# Altium PCB PCB1.PcbDoc
Units mm, origin at the board's own origin, x right, y up, seen from the top; angles counter-clockwise.
Board outline 152.4 x 101.6 mm, 2 copper layers (Top Layer, Bottom Layer); 23 components, 84 nets, 266 pads, 70 vias.
Unrouted connection lines stored in the file: 3.
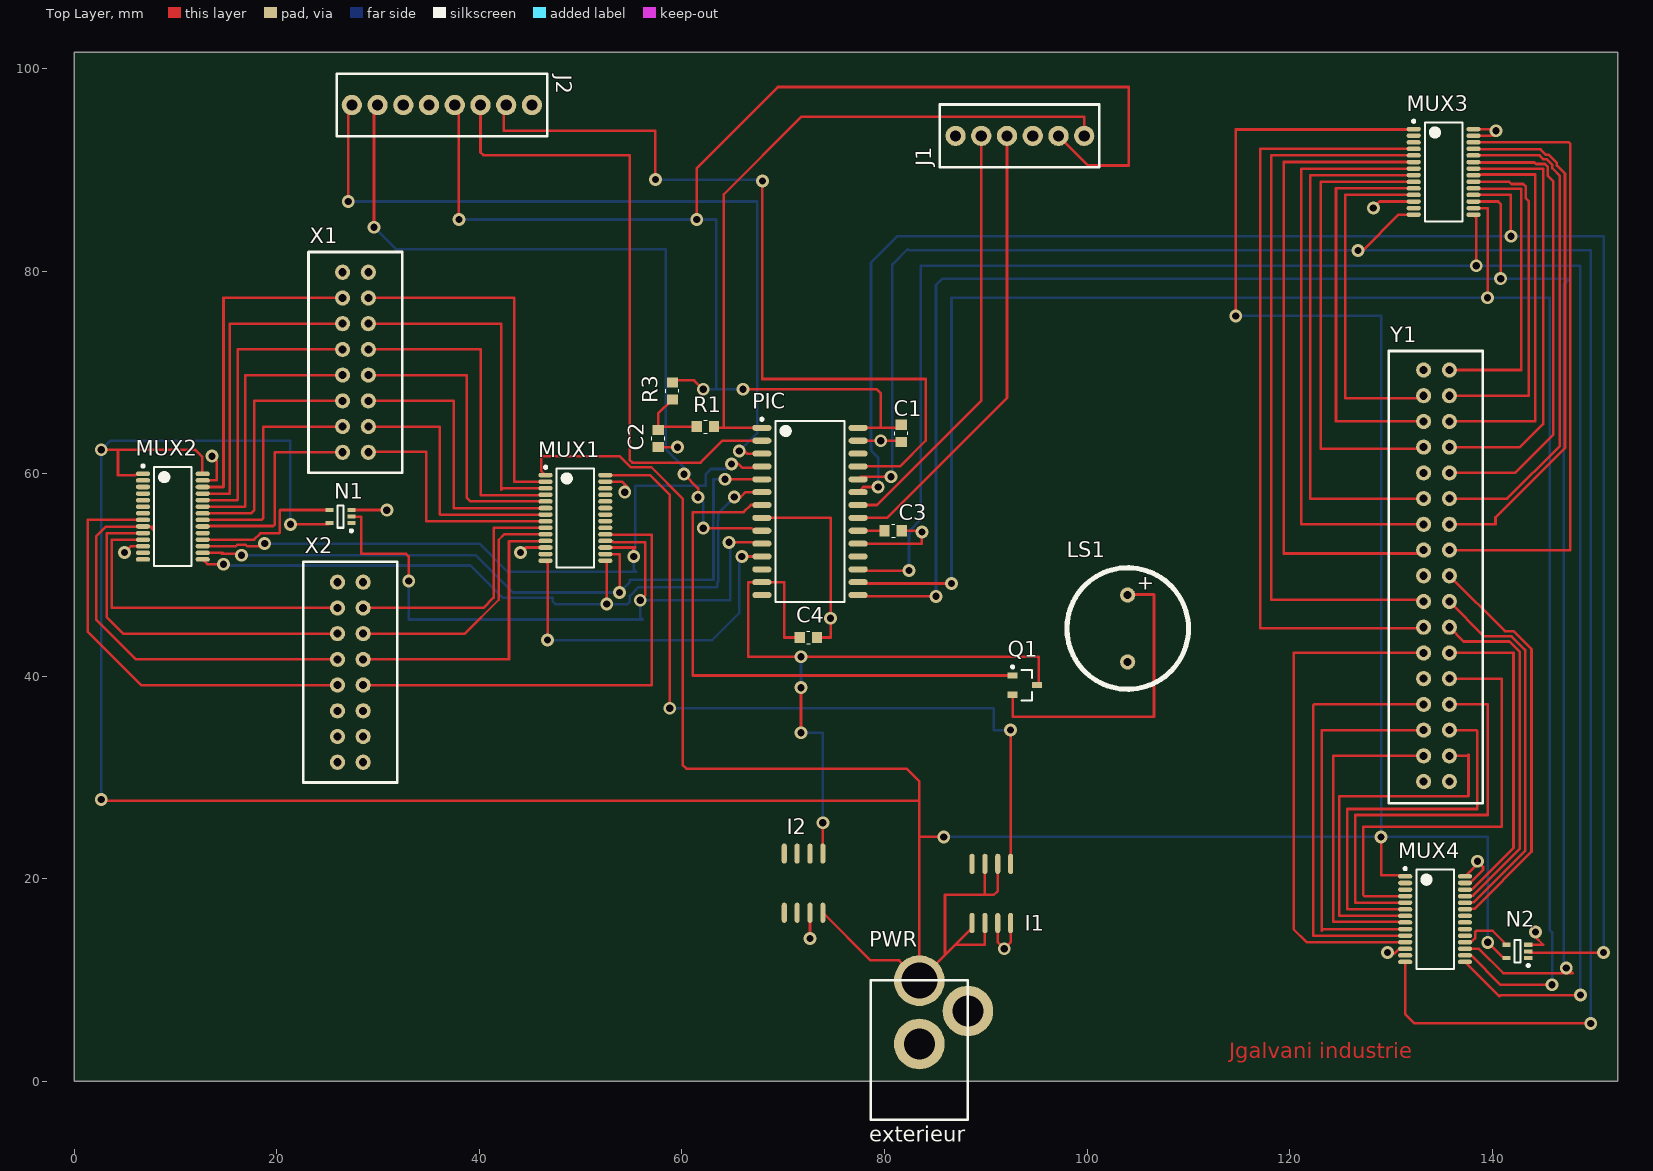
[diagram p0: Top Layer view]
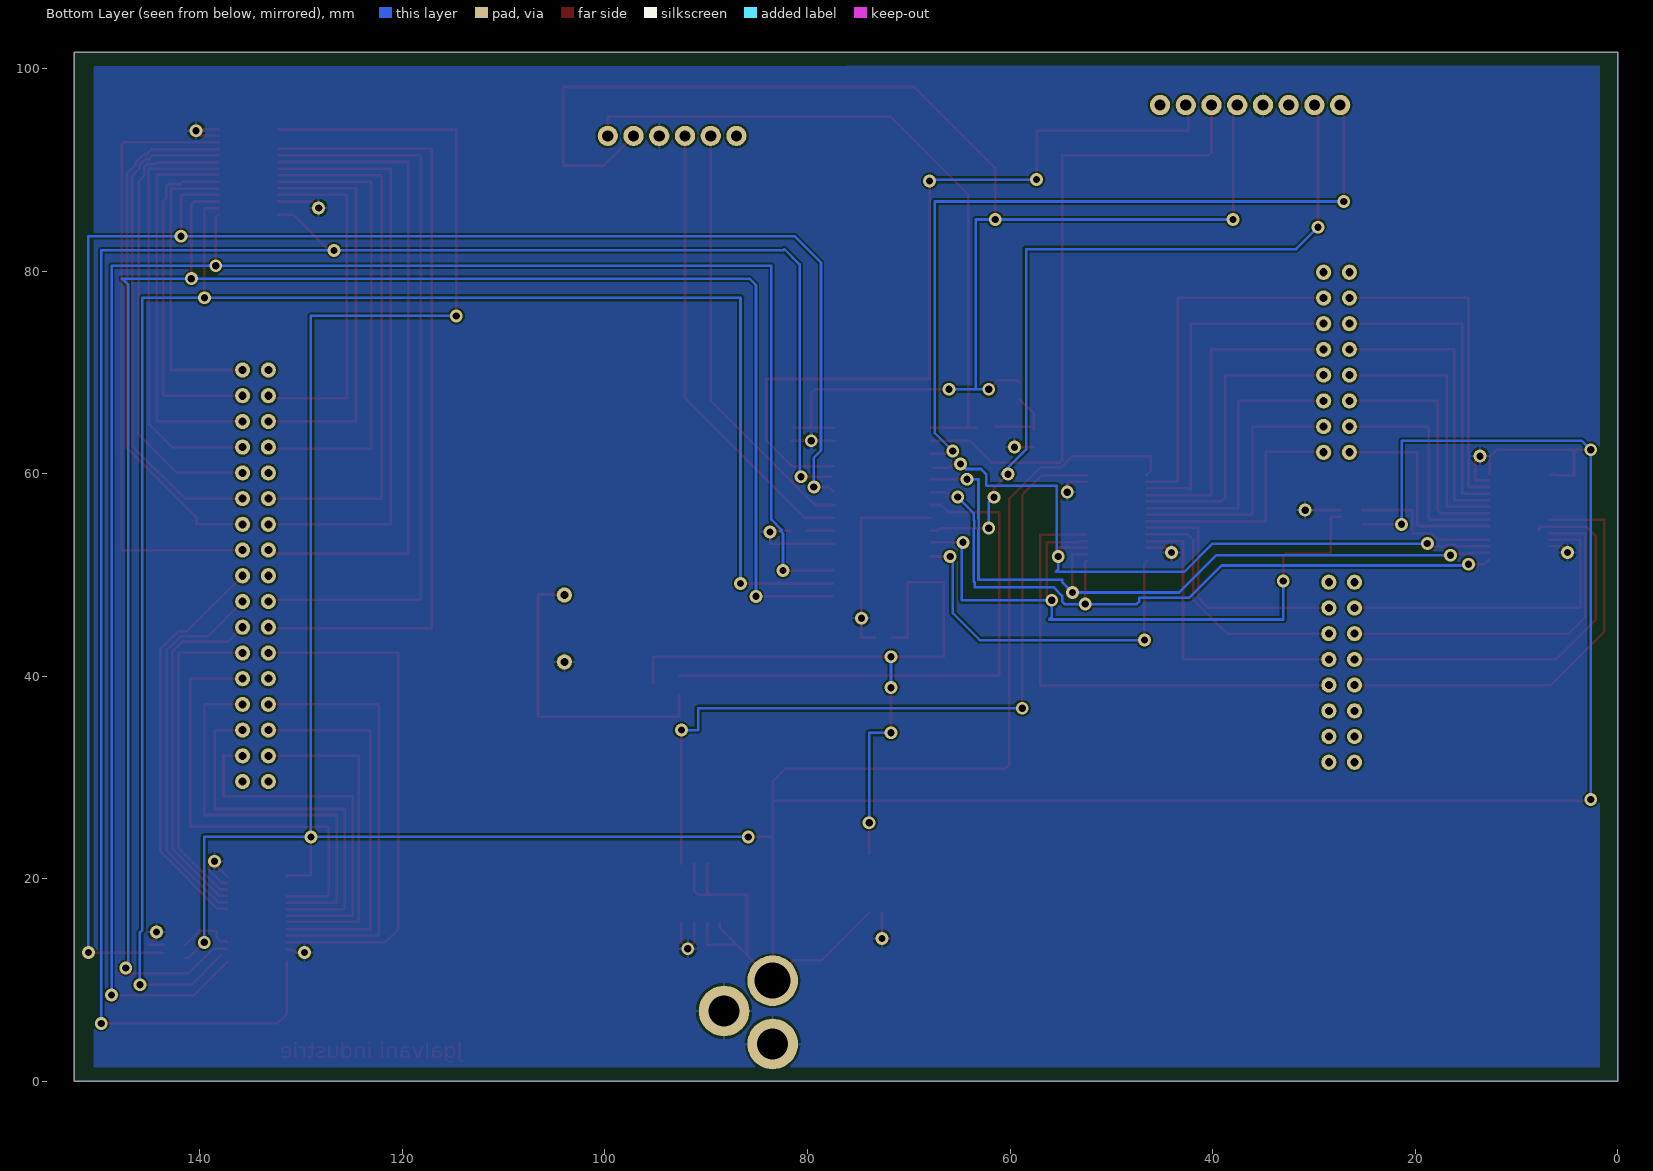
[diagram p1: Bottom Layer view, seen from below]

## Layer stack, top to bottom
Top Solder: solder mask 0.0102, Solder Resist, Dk 3.5
Top Layer: signal copper 0.0356
Dielectric 1: dielectric 0.32, FR-4, Dk 4.8
Bottom Layer: signal copper 0.0356
Bottom Solder: solder mask 0.0102, Solder Resist, Dk 3.5

## Board outline
0,0 152.4,0 152.4,101.6 0,101.6

## Design rules (kind name [scope] priority, off if disabled: settings)
Clearance [All] p1: gap=0.2
HoleSize [All] p1: absolutevalues=TRUE maxlimit=2.54 minlimit=0.3 maxpercent=80.000 minpercent=20.000
PolygonConnect [All] p1: connectstyle=Relief reliefconductorwidth=0.254 reliefentries=4 polygonreliefangle="90 Angle" airgapwidth=0.254
RoutingVias [All] p1: holewidth=0.711 width=1.27 viastyle="Through Hole" minholewidth=0.3 minwidth=1.27 maxholewidth=0.711 maxwidth=1.27
SolderMaskExpansion [All] p1: expansion=0.102
UnpouredPolygon [All] p1: allowunpoured=FALSE
Width [All] p1: maxlimit=1 minlimit=0.2 preferedwidth=0.254
28 further rules are at their usual default settings.

## Classes and differential pairs
component class Power: I1 I2 PWR T1 T2 T3 T4
component class ProtoBoard: C1 C2 C3 C4 J1 J2 LS1 MUX1 MUX2 MUX3 MUX4 N1 N2 PIC Q1 R1 R3 X1 X2 Y1

## Components (designator, comment, footprint, x,y, rotation, side; value= is the part's Value field where it differs from the comment)
C1 "Cap" 0603 81.661,63.119 r90 top
C2 "Cap" 0603 57.658,62.611 r90 top
C3 "Cap" 0603 80.01,54.356 r0 top
C4 "Cap" 0603 71.628,43.815 r0 top
I1 "inverseur" "SOIC 8" 88.646,21.463 r0 top
I2 "regulateur tension" "SOIC 8" 73.914,16.637 r180 top
J1 "Program/Debug" Debug 99.695,93.345 r180 top
J2 "Bornier fil a carte" PCBComponent_1 25.908,96.393 r0 top
LS1 "Buzzer" ABT-410-RC 104.013,44.704 r0 top
MUX1 "Multiplexer" TSOP65P640X120-28N 49.481,55.626 r0 top
MUX2 "Multiplexer" TSOP65P640X120-28N 9.73,55.753 r0 top
MUX3 "ADG1606" TSOP65P640X120-28N 135.206,89.789 r0 top
MUX4 "Multiplexer" TSOP65P640X120-28N 134.366,16.002 r0 top
N1 "Porte NOT" SOT65P210X110-5N 26.289,55.753 r180 top
N2 "Porte NOT" SOT65P210X110-5N 142.494,12.827 r180 top
PIC "PIC32MX170F256B-I/SO" SOIC127P1030X265-28N 72.644,56.261 r0 top
PWR "conecteur alimentation" "RAPC722X connecteur alimentation" 83.439,-3.81 r0 top
Q1 "MOSFET Canal N" SOT95P245X110-3N 93.853,39.116 r0 top
R1 "Res3" 0603 61.468,64.643 r0 top
R3 "10k" 0603 59.055,67.31 r90 top
X1 "Connecteur carte a carte" "M80-8541642 connecteur 16 pins" 27.764,62.103 r90 top
X2 "Connecteur carte a carte" "M80-8541642 connecteur 16 pins" 27.256,31.496 r90 top
Y1 "Limande 34 fils" "HTSS-117-01-T-DV-P-TR Connecteur 34 pins" 134.444,70.104 r90 top

## Footprints (in the part's own frame and the unit in brackets; to place one, negate y for a bottom-side part, rotate by r counter-clockwise, add the part's x,y. Pads: shape width x height; smd on the part's side, far side on the other; paste and mask are expansions set on the pad)
0603 [mm]
  rect 1x1.1 smd: 1(0,0) 2(1.7,0)
  silkscreen extent 0.69,-0.64 1.03,0.64
ABT-410-RC [mm]
  round 1.5 hole 0.8: 1(0,3.302) 2(0,-3.302)
  silkscreen extent -6,-6 6,6
Debug [mm]
  round 2 hole 1.1: 1(-0.024,0) 2(2.516,0) 3(5.056,0) 4(7.596,0) 5(10.136,0) 6(12.676,0)
  silkscreen extent -1.52,-3.1 14.22,3.1
"HTSS-117-01-T-DV-P-TR Connecteur 34 pins" [mm]
  round 1.5 hole 0.8: 1(0.127,1.206) 2(0.127,-1.334) 3(-2.413,1.206) 4(-2.413,-1.334) 5(-4.953,1.206) 6(-4.953,-1.334) 7(-7.493,1.206) 8(-7.493,-1.334) 9(-10.033,1.206) 10(-10.033,-1.334) 11(-12.573,1.206) 12(-12.573,-1.334) 13(-15.113,1.206) 14(-15.113,-1.334) 15(-17.653,1.206) 16(-17.653,-1.334) 17(-20.193,1.206) 18(-20.193,-1.334) 19(-22.733,1.206) 20(-22.733,-1.334) 21(-25.273,1.206) 22(-25.273,-1.334) 23(-27.813,1.206) 24(-27.813,-1.334) 25(-30.353,1.206) 26(-30.353,-1.334) 27(-32.893,1.206) 28(-32.893,-1.334) 29(-35.433,1.206) 30(-35.433,-1.334) 31(-37.973,1.206) 32(-37.973,-1.334) 33(-40.513,1.206) 34(-40.513,-1.334)
  silkscreen extent -42.64,-4.63 2,4.63
"M80-8541642 connecteur 16 pins" [mm]
  round 1.5 hole 0.8: 1(17.78,1.27) 2(17.78,-1.27) 3(15.24,1.27) 4(15.24,-1.27) 5(12.7,1.27) 6(12.7,-1.27) 7(10.16,1.27) 8(10.16,-1.27) 9(7.62,1.27) 10(7.62,-1.27) 11(5.08,1.27) 12(5.08,-1.27) 13(2.54,1.27) 14(2.54,-1.27) 15(0,1.27) 16(0,-1.27)
  silkscreen extent -2,-4.63 19.78,4.63
PCBComponent_1 [mm]
  round 2 hole 1.1: 1(1.5,0) 2(4.04,0) 3(6.58,0) 4(9.12,0) 5(11.66,0) 6(14.2,0) 7(16.74,0) 8(19.28,0)
  silkscreen extent 0,-3.1 20.78,3.1
"RAPC722X connecteur alimentation" [mm]
  round 5 hole 3.56: 1(0,13.74)
  round 5 hole 3.048: 2(4.8,10.74)
  round 5 hole 3.05: 3(0,7.49)
  silkscreen extent -4.8,0 4.8,13.8
SOIC127P1030X265-28N [mm] "SOIC, 28-Leads, Body 17.90x7.50mm, Pitch 1.27mm, IPC Medium Density"
  oval 1.9x0.6 smd: 1(-4.75,8.255) 2(-4.75,6.985) 3(-4.75,5.715) 4(-4.75,4.445) 5(-4.75,3.175) 6(-4.75,1.905) 7(-4.75,0.635) 8(-4.75,-0.635) 9(-4.75,-1.905) 10(-4.75,-3.175) 11(-4.75,-4.445) 12(-4.75,-5.715) 13(-4.75,-6.985) 14(-4.75,-8.255) 15(4.75,-8.255) 16(4.75,-6.985) 17(4.75,-5.715) 18(4.75,-4.445) 19(4.75,-3.175) 20(4.75,-1.905) 21(4.75,-0.635) 22(4.75,0.635) 23(4.75,1.905) 24(4.75,3.175) 25(4.75,4.445) 26(4.75,5.715) 27(4.75,6.985) 28(4.75,8.255)
  silkscreen extent -4.87,-8.95 3.4,9.23, body extent -3.8,-8.95 3.8,8.95, height 2.65
"SOIC 8" [mm]
  oval 0.5x2 smd: 1(0,-5.842) 2(1.27,-5.842) 3(2.54,-5.842) 4(3.81,-5.842) 5(3.81,0) 6(2.54,0) 7(1.27,0) 8(0,0)
SOT65P210X110-5N [mm] "SOT23, 5-Leads, Body 2.00x2.10mm, Pitch 0.65mm, IPC Medium Density"
  rect 0.8x0.4 smd: 1(-1.075,0.65) 2(-1.075,0) 3(-1.075,-0.65) 4(1.075,-0.65) 5(1.075,0.65)
  silkscreen extent -1.2,-1.1 0.3,1.52, body extent -0.67,-1.1 0.67,1.1, height 1.1
SOT95P245X110-3N [mm] "SOT23, 3-Leads, Body 2.90x2.45mm, Pitch 0.95mm, IPC Medium Density"
  rect 1x0.6 smd: 1(-1.2,0.95) 2(-1.2,-0.95) 3(1.2,0)
  silkscreen extent -1.32,-1.5 0.7,1.92, body extent -0.7,-1.5 0.7,1.5, height 1.1
TSOP65P640X120-28N [mm] "TSOP, 28-Leads, Body 9.70x4.40mm, Pitch 0.65mm, IPC Medium Density"
  oval 1.4x0.45 smd: 1(-2.95,4.225) 2(-2.95,3.575) 3(-2.95,2.925) 4(-2.95,2.275) 5(-2.95,1.625) 6(-2.95,0.975) 7(-2.95,0.325) 8(-2.95,-0.325) 9(-2.95,-0.975) 10(-2.95,-1.625) 11(-2.95,-2.275) 12(-2.95,-2.925) 13(-2.95,-3.575) 14(-2.95,-4.225) 15(2.95,-4.225) 16(2.95,-3.575) 17(2.95,-2.925) 18(2.95,-2.275) 19(2.95,-1.625) 20(2.95,-0.975) 21(2.95,-0.325) 22(2.95,0.325) 23(2.95,0.975) 24(2.95,1.625) 25(2.95,2.275) 26(2.95,2.925) 27(2.95,3.575) 28(2.95,4.225)
  silkscreen extent -3.07,-4.9 1.85,5.12, body extent -2.25,-4.9 2.25,4.9, height 1.2

## Part data
C1 C2 C3 C4: "Capacitor"
J1 J2 MUX1 MUX2 MUX4: library part Component_1
PIC: library part PICMX1XX
Q1: library part MOSFET-N, "N-Channel MOSFET"
R1: "Resistor"
R3: library part Res1, "Resistor"

## Via types
v1: diameter 1.27, hole 0.711, Top Layer to Bottom Layer, 70 vias

## Nets (pads, with @x,y where several pads share a name; then routed paths per layer and width w, separated by ;. In a path a pad name is that pad's centre, name@x,y a point inside that pad or via, vN(x,y) a via of type N, cw(c..) or ccw(c..) an arc to the next point about the centre after c; other vN are vias at no path point)
A0: MUX1.17 MUX2.17 PIC.4 | length 70.7
  Top Layer w0.254: MUX2.17 15.958,52.828 16.089,52.959 16.931,52.959 17.058,52.832 v1@18.796,52.832 ; MUX1.17 55.372,52.701 55.184,52.512 55.245,52.451 v1(55.245,51.816) ; v1(64.897,60.96) 65.571,60.96 65.952,60.579 PIC.4@67.564,60.579
  Bottom Layer w0.254: v1(18.796,53.086) 40.005,53.086 42.799,50.292 55.499,50.292 55.245,50.546 v1(55.245,51.816) ; v1@55.372,51.689 55.372,58.801 62.357,58.801 62.357,59.944 62.865,60.452 64.389,60.452 v1(64.897,60.96)
A1: MUX1.16 MUX2.16 PIC.5 | length 72.7
  Top Layer w0.254: MUX2.16 14.673,52.178 14.565,52.07 16.383,52.07 v1(16.51,51.943) ; MUX1.16 53.867,52.051 53.848,52.032 v1(53.848,48.26) ; v1(64.262,59.436) PIC.5@67.845,59.436
  Bottom Layer w0.254: v1(16.51,51.943) 39.624,51.943 43.307,48.26 v1@53.721,48.26 ; v1(53.848,48.26) 54.864,49.276 54.864,49.53 63.119,49.53 63.119,54.385 63.1,54.404 63.1,55.578 63.119,55.597 63.119,59.436 v1(64.262,59.436)
A2: MUX1.15 MUX2.15 PIC.6 | length 70.9
  Top Layer w0.254: MUX2.15 13.154,51.054 v1(14.732,51.054) ; MUX1.15 52.578,51.254 v1(52.578,47.117) ; v1(65.171,57.678) 65.806,57.678 66.294,58.166 PIC.6@67.845,58.166
  Bottom Layer w0.254: v1(14.732,51.054) 14.859,50.927 39.116,50.927 42.291,47.752 47.244,47.752 47.244,47.371 47.498,47.117 v1(52.578,47.117) 54.61,47.117 54.864,47.371 54.864,47.919 55.733,48.788 63.5,48.788 63.5,49.269 63.573,49.342 63.573,54.574 63.554,54.593 63.554,55.389 63.573,55.408 63.573,56.08 v1(65.171,57.678) v1@65.278,57.785
A3: MUX1.14 MUX2.14 PIC.11 | length 35.5
  Top Layer w0.254: MUX1.14 46.482,51.352 46.736,51.098 v1(46.736,43.561) ; v1(65.913,51.816) PIC.11@67.845,51.816
  Bottom Layer w0.254: v1(46.736,43.561) 62.992,43.561 65.659,46.228 v1@65.659,51.816
"A EN": MUX1.18 N1.2 PIC.10 | length 67.6
  Top Layer w0.254: N1.2 28.321,55.753 28.321,52.07 32.766,52.07 33.02,51.816 v1(33.02,49.403) ; MUX1.18 52.475,53.307 53.157,53.307 53.251,53.213 56.388,53.213 56.388,48.006 ; v1(64.643,53.213) PIC.10@67.718,53.213
  Bottom Layer w0.254: v1(33.02,49.403) 33.02,45.593 56.134,45.593 55.88,45.847 v1(55.88,47.498) 64.77,47.498 v1@64.77,53.086
B0: MUX3.17 MUX4.17 PIC.15 | length 192.3
  Top Layer w0.254: PIC.15@77.521,47.879 v1(85.09,47.879) ; MUX4.17 138.688,13.077 141.097,10.668 147.955,10.668 147.447,11.176 v1(147.32,11.176) ; MUX3.17 140.593,86.864 140.843,86.614 v1(140.843,79.248)
  Bottom Layer w0.254: v1(85.09,47.879) 85.09,78.613 85.725,79.248 v1(140.843,79.248) 147.701,79.248 147.066,78.613 147.066,11.43 v1(147.32,11.176)
B1: MUX3.16 MUX4.16 PIC.16 | length 183.8
  Top Layer w0.254: PIC.16@77.521,49.149 v1(86.614,49.149) ; MUX4.16@137.941,12.427 140.843,9.525 v1(145.923,9.525) ; MUX3.16 139.554,86.214 v1(139.554,77.362)
  Bottom Layer w0.254: v1(86.614,49.149) 86.614,77.343 86.595,77.362 v1(139.554,77.362) 145.669,77.362 145.669,14.949 145.923,14.695 145.923,9.918 v1(145.923,9.525)
B2: MUX3.15 MUX4.15 PIC.17 | length 191.3
  Top Layer w0.254: PIC.17 77.521,50.419 v1(82.423,50.419) ; MUX4.15 140.711,8.382 140.838,8.509 v1(148.717,8.509) ; MUX3.15 138.43,85.29 v1(138.43,80.518)
  Bottom Layer w0.254: v1(82.423,50.419) 82.423,54.065 82.677,54.319 82.55,54.446 83.566,55.462 83.566,80.518 v1(138.43,80.518) 148.717,80.518 148.717,12.834 ; v1(148.717,8.509) 148.717,13.208
B3: MUX3.14 MUX4.14 PIC.24 | length 200.8
  Top Layer w0.254: PIC.24@77.648,59.69 v1(80.645,59.69) ; v1(126.746,82.042) 127.254,82.042 130.776,85.564 MUX3.14 ; MUX4.14 131.416,6.633 132.334,5.715 v1(149.733,5.715)
  Bottom Layer w0.254: v1(80.645,59.69) 80.772,59.817 80.772,80.645 82.296,82.169 82.423,82.042 v1(126.746,82.042) 149.733,82.042 v1(149.733,5.715)
"B EN": MUX3.18 N2.2 PIC.23 | length 184.1
  Top Layer w0.254: PIC.23 77.902,58.674 v1(79.375,58.674) ; MUX3.18 141.859,87.514 v1(141.859,83.439) v1@141.859,83.228 ; N2.2@143.692,12.704 150.999,12.704 v1(151.003,12.7)
  Bottom Layer w0.254: v1(79.375,58.674) 79.375,61.576 78.667,62.284 78.667,80.826 81.28,83.439 v1(141.859,83.439) 151.003,83.439 v1(151.003,12.7)
BUZZER: PIC.7 Q1.1 | length 54.8
  Top Layer w0.254: PIC.7 66.802,56.896 66.101,56.195 61.087,56.195 61.087,40.066 Q1.1
CLOCK: J2.7 PIC.25 | length 82.5
  Top Layer w0.254: J2.7@42.418,96.163 42.418,93.853 57.38,93.853 v1(57.38,89.027) ; v1(67.945,88.9) 67.945,69.342 84.074,69.342 84.074,63.246 81.534,60.706 PIC.25
  Bottom Layer w0.254: v1(57.38,89.027) 68.072,89.027 v1(67.945,88.9)
"COLOR SECURE X": MUX2.18 N1.4 | length 14.9
  Top Layer w0.254: MUX2.18 17.751,53.478 18.375,54.102 20.193,54.102 20.266,54.175 20.266,56.349 ; 20.32,56.403 N1.4
"COLOR SECURE Y": MUX4.18 N2.4 | length 5.5
  Top Layer w0.254: MUX4.18 137.414,13.825 138.02,13.825 138.343,14.148 138.343,14.754 138.448,14.859 140.037,14.859 N2.4
GND: C1.1 C2.1 C3.2 C4.2 I1.3 I1.4 I2.7 J1.3 J2.4 LS1.2 MUX1.12 MUX1.27 MUX2.12 MUX2.27 MUX3.12 MUX3.27 MUX3.28 MUX4.12 MUX4.27 MUX4.28 N1.3 N2.3 PIC.8 PIC.19 PIC.27 PWR.2 PWR.3 | length 78.8
  Top Layer w0.254: v1(4.953,52.197) 5.584,52.828 MUX2.12 ; MUX2.27 14.078,59.328 14.078,61.233 v1(13.589,61.722) ; N1.3 v1@30.846,56.403 ; v1(44.069,52.197) 44.573,52.701 MUX1.12 ; MUX1.27 54.083,59.201 54.61,58.674 54.356,58.42 v1(54.356,58.166) ; C2.1 v1(59.563,62.611) ; PIC.8@67.845,55.626 74.676,55.626 74.676,43.815 C4.2 ; v1(72.644,14.097) I2.7 ; PIC.19@77.345,53.086 83.693,53.086 v1(83.693,54.229) 83.566,54.356 C3.2 ; PIC.27@77.345,63.246 C1.1@81.534,63.246 ; I1.3 91.186,13.716 v1(91.821,13.081) 92.456,13.716 I1.4 ; v1(128.27,86.233) 128.901,86.864 MUX3.12 ; v1(129.667,12.7) 130.179,12.7 130.306,12.573 130.712,12.979 131.31,12.979 131.412,13.081 MUX4.12 ; MUX4.27 137.814,19.577 139.096,20.859 139.096,21.178 v1(138.557,21.717) 138.557,21.468 MUX4.28 ; MUX3.27 140.316,93.364 140.369,93.417 140.369,94.014 MUX3.28 ; N2.3 145.049,13.477 144.272,14.254 v1(144.272,14.732)
  other v1: 74.676,45.72 30.861,56.388 79.629,63.246 140.369,93.853
MCLR: J1.1 PIC.1 R1.2 | length 68.2
  Top Layer w0.254: R1.2@63.295,64.516 PIC.1@67.845,64.516 ; 64.135,64.516 64.135,87.582 71.779,95.226 99.719,95.226 J1.1
MISO: 
MISO1: J2.1 PIC.3 | length 77.3
  Top Layer w0.254: v1(27.051,86.868) J2.1@27.051,96.036 ; v1(65.659,62.23) 66.167,62.23 66.421,61.976 PIC.3
  Bottom Layer w0.254: v1(27.051,86.868) 67.437,86.868 67.437,64.008 v1(65.659,62.23)
MISO2: PIC.12
MOSI: 
MOSI1: J2.2 PIC.9 | length 77.3
  Top Layer w0.254: v1(29.591,84.328) J2.2@29.591,96.036 ; v1(60.198,59.944) 61.595,58.547 v1(61.595,57.658) ; v1(62.103,54.61) 66.878,54.61 67.132,54.356 PIC.9
  Bottom Layer w0.254: v1(29.591,84.328) 31.75,82.169 58.42,82.169 58.42,62.357 60.833,59.944 v1(60.198,59.944) ; v1(61.595,57.658) 62.103,57.15 v1(62.103,54.61)
MOSI2: PIC.14
NetC2_2: C2.2 R1.1 R3.1 | length 7.1
  Top Layer w0.254: C2.2 57.658,65.913 R3.1 ; C2.2@57.99,64.643 R1.1
NetC3_1: C3.1 PIC.20 | length 2.7
  Top Layer w0.254: PIC.20@77.345,54.356 C3.1
NetLS1_1: LS1.1 Q1.2 | length 30.7
  Top Layer w0.254: Q1.2 92.653,35.998 106.61,35.998 106.61,48.063 LS1.1@104.07,48.063
NetMUX1_2: MUX1.2 X1.4 | length 35.7
  Top Layer w0.254: X1.4 43.434,77.343 43.434,59.182 46.512,59.182 MUX1.2
NetMUX1_3: MUX1.3 X1.6 | length 33.9
  Top Layer w0.254: X1.6 42.164,74.803 42.164,58.42 42.295,58.551 MUX1.3
NetMUX1_4: MUX1.4 X1.8 | length 31.9
  Top Layer w0.254: X1.8 40.132,72.263 40.132,57.857 46.487,57.857 MUX1.4
NetMUX1_5: MUX1.5 X1.10 | length 29.7
  Top Layer w0.254: X1.10 38.735,69.723 38.735,57.658 39.142,57.251 MUX1.5
NetMUX1_6: MUX1.6 X1.12 | length 28.1
  Top Layer w0.254: X1.12 37.465,67.183 37.465,56.557 MUX1.6@46.487,56.557
NetMUX1_7: MUX1.7 X1.14 | length 26.2
  Top Layer w0.254: X1.14 36.068,64.643 36.068,56.007 36.124,55.951 MUX1.7
NetMUX1_8: MUX1.8 X1.16 | length 24.3
  Top Layer w0.254: X1.16@29.09,62.159 34.742,62.159 34.742,55.301 MUX1.8
NetMUX1_9: MUX1.9 X2.4 | length 25.3
  Top Layer w0.254: X2.4 40.386,46.736 41.402,47.752 41.402,54.61 41.443,54.651 MUX1.9
NetMUX1_10: MUX1.10 X2.6 | length 25.5
  Top Layer w0.254: X2.6 38.564,44.196 41.91,47.542 41.91,53.467 42.444,54.001 MUX1.10
NetMUX1_11: MUX1.11 X2.8 | length 29.7
  Top Layer w0.254: X2.8 42.926,41.656 42.926,53.34 46.52,53.34 MUX1.11
NetMUX1_19: MUX1.19 X2.10 | length 47.9
  Top Layer w0.254: X2.10 57.023,39.116 57.023,53.975 MUX1.19@52.457,53.975
NetMUX2_8: MUX2.8 X2.9 | length 43.3
  Top Layer w0.254: MUX2.8 1.326,55.428 1.326,44.394 6.604,39.116 X2.9
NetMUX2_9: MUX2.9 X2.7 | length 40.4
  Top Layer w0.254: X2.7 6.096,41.656 2.159,45.593 2.159,53.804 3.089,54.734 7.506,54.734 ; 7.506,54.734 7.814,54.426 7.814,54.717 7.797,54.734 7.506,54.734
NetMUX2_10: MUX2.10 X2.5 | length 35.3
  Top Layer w0.254: MUX2.10 3.201,54.128 3.201,45.821 4.826,44.196 X2.5
NetMUX2_11: MUX2.11 X2.3 | length 32.1
  Top Layer w0.254: MUX2.11 6.769,53.467 3.683,53.467 3.683,46.736 X2.3
NetMUX2_20: MUX2.20 X1.15 | length 21
  Top Layer w0.254: MUX2.20 12.724,54.822 17.16,54.822 17.163,54.825 19.646,54.825 19.812,54.991 19.812,62.103 X1.15
NetMUX2_21: MUX2.21 X1.13 | length 22.9
  Top Layer w0.254: MUX2.21 18.471,55.428 18.669,55.626 18.669,64.643 X1.13
NetMUX2_22: MUX2.22 X1.11 | length 24.7
  Top Layer w0.254: MUX2.22 17.47,56.078 17.78,56.388 17.78,67.183 X1.11
NetMUX2_23: MUX2.23 X1.9 | length 26.8
  Top Layer w0.254: MUX2.23 16.85,56.728 16.891,56.769 16.891,69.723 X1.9
NetMUX2_24: MUX2.24 X1.7 | length 28.7
  Top Layer w0.254: MUX2.24 16.103,57.378 16.129,57.404 16.129,72.263 X1.7
NetMUX2_25: MUX2.25 X1.5 | length 30.6
  Top Layer w0.254: MUX2.25 15.356,58.028 15.356,74.792 15.367,74.803 X1.5
NetMUX2_26: MUX2.26 X1.3 | length 32.5
  Top Layer w0.254: MUX2.26@12.684,58.674 14.732,58.674 14.732,77.343 X1.3
NetMUX3_4: MUX3.4 Y1.21 | length 78.6
  Top Layer w0.254: MUX3.4 117.083,92.064 117.083,44.715 Y1.21@133.122,44.715
NetMUX3_5: MUX3.5 Y1.19 | length 72.8
  Top Layer w0.254: MUX3.5 118.211,91.414 118.211,47.524 Y1.19@133.085,47.524
NetMUX3_6: MUX3.6 Y1.15 | length 65
  Top Layer w0.254: MUX3.6 119.421,90.764 119.421,52.111 Y1.15@132.898,52.111
NetMUX3_7: MUX3.7 Y1.13 | length 58.3
  Top Layer w0.254: MUX3.7 121.158,90.114 121.158,54.991 Y1.13
NetMUX3_8: MUX3.8 Y1.11 | length 53.3
  Top Layer w0.254: MUX3.8 122.047,89.464 122.047,57.531 Y1.11
NetMUX3_9: MUX3.9 Y1.7 | length 45.6
  Top Layer w0.254: MUX3.9 123.063,88.814 123.063,62.443 Y1.7@133.07,62.443
NetMUX3_10: MUX3.10 Y1.5 | length 39.3
  Top Layer w0.254: MUX3.10 124.587,88.164 124.587,65.151 Y1.5
NetMUX3_11: MUX3.11 Y1.3 | length 34.3
  Top Layer w0.254: MUX3.11 125.487,87.514 125.487,67.426 Y1.3@132.973,67.426
NetMUX3_19: MUX3.19 Y1.2 | length 29.7
  Top Layer w0.254: Y1.2 142.875,70.231 142.875,88.138 MUX3.19@138.182,88.138
NetMUX3_20: MUX3.20 Y1.4 | length 34
  Top Layer w0.254: Y1.4 143.637,67.691 143.637,86.868 143.329,87.176 143.329,88.326 143.063,88.592 141.913,88.592 141.691,88.814 MUX3.20
NetMUX3_21: MUX3.21 Y1.6 | length 39
  Top Layer w0.254: Y1.6 144.272,65.151 144.272,89.535 138.909,89.535 138.909,89.508 MUX3.21@138.2,89.508
NetMUX3_22: MUX3.22 Y1.8 | length 42.3
  Top Layer w0.254: Y1.8 142.748,62.611 145.034,64.897 145.034,90.114 MUX3.22
NetMUX3_23: MUX3.23 Y1.10 | length 46
  Top Layer w0.254: Y1.10 142.24,60.071 146.05,63.881 146.05,88.856 145.488,89.418 145.488,90.302 145.222,90.568 144.338,90.568 144.186,90.72 MUX3.23@138.2,90.72
NetMUX3_24: MUX3.24 Y1.12 | length 49.3
  Top Layer w0.254: Y1.12 141.478,57.531 146.685,62.738 146.685,89.408 145.942,90.151 145.942,90.49 145.41,91.022 145.071,91.022 144.679,91.414 MUX3.24
NetMUX3_25: MUX3.25 Y1.14 | length 52.2
  Top Layer w0.254: Y1.14 140.335,54.991 140.335,55.67 147.193,62.528 147.193,89.618 146.396,90.415 146.396,90.678 145.598,91.476 145.335,91.476 144.791,92.02 138.2,92.02 MUX3.25
NetMUX3_26: MUX3.26 Y1.16 | length 61.7
  Top Layer w0.254: Y1.16 147.701,52.451 147.701,92.583 147.57,92.714 MUX3.26
NetMUX4_4: MUX4.4 Y1.26 | length 44.5
  Top Layer w0.254: MUX4.4 127.392,18.277 127.254,18.415 127.254,25.146 140.97,25.146 140.97,39.751 Y1.26
NetMUX4_5: MUX4.5 Y1.28 | length 41.4
  Top Layer w0.254: MUX4.5 126.466,17.627 126.492,17.653 126.492,26.289 139.573,26.289 139.573,37.211 Y1.28
NetMUX4_6: MUX4.6 Y1.30 | length 38.9
  Top Layer w0.254: MUX4.6 125.689,16.977 125.689,26.883 138.516,26.883 138.516,34.585 138.43,34.671 Y1.30
NetMUX4_7: MUX4.7 Y1.32 | length 37.1
  Top Layer w0.254: MUX4.7 124.912,16.327 124.912,28.138 137.612,28.138 137.668,28.194 137.668,32.258 137.541,32.131 Y1.32
NetMUX4_8: MUX4.8 Y1.31 | length 32.3
  Top Layer w0.254: MUX4.8@131.345,15.748 124.333,15.748 124.333,32.131 Y1.31
NetMUX4_9: MUX4.9 Y1.29 | length 38.2
  Top Layer w0.254: MUX4.9 123.358,15.027 123.19,14.859 123.19,34.671 Y1.29
NetMUX4_10: MUX4.10 Y1.27 | length 42.8
  Top Layer w0.254: MUX4.10 122.327,14.377 122.327,37.11 122.428,37.211 Y1.27
NetMUX4_11: MUX4.11 Y1.23 | length 51.7
  Top Layer w0.254: MUX4.11 121.677,13.727 120.396,15.008 120.396,42.291 Y1.23
NetMUX4_23: MUX4.23 Y1.18 | length 40
  Top Layer w0.254: Y1.18 141.251,44.438 142.121,44.438 143.891,42.668 143.891,22.665 138.247,17.021 137.36,17.021 MUX4.23
NetMUX4_24: MUX4.24 Y1.20 | length 37.4
  Top Layer w0.254: Y1.20 139.219,43.93 141.911,43.93 143.256,42.585 143.256,22.748 138.179,17.671 137.36,17.671 MUX4.24
NetMUX4_25: MUX4.25 Y1.22 | length 34.8
  Top Layer w0.254: Y1.22 137.187,43.422 141.7,43.422 142.748,42.374 142.748,22.959 138.11,18.321 137.36,18.321 MUX4.25
NetMUX4_26: MUX4.26 Y1.24 | length 32.1
  Top Layer w0.254: Y1.24 142.113,42.291 142.113,23.042 138.042,18.971 137.36,18.971 MUX4.26
PGC: J1.5 PIC.22 | length 42.6
  Top Layer w0.254: PIC.22@77.345,56.896 79.248,56.896 89.559,67.207 J1.5
PGD: J1.4 PIC.21 | length 45.5
  Top Layer w0.254: PIC.21@77.345,55.626 80.264,55.626 92.099,67.461 J1.4
SCK2: PIC.26
SS1: J2.6 PIC.2 | length 63.7
  Top Layer w0.254: J2.6 40.108,91.718 40.386,91.44 54.84,91.44 54.84,61.365 55.118,61.087 61.849,61.087 64.008,63.246 PIC.2
SS2: PIC.18
V+: I1.1 I1.2 I1.6 I1.7 I2.8 MUX1.1 MUX2.1 MUX2.28 MUX3.1 MUX4.1 N1.5 N2.5 PWR.1 | length 470.1
  Top Layer w0.254: v1(2.667,62.357) 4.318,62.357 ; v1@2.921,27.686 83.439,27.686 ; MUX2.1@6.682,59.88 6.013,59.88 6.013,59.817 4.318,59.817 4.318,62.357 ; MUX2.28 12.627,59.978 12.627,61.668 11.938,62.357 4.318,62.357 ; v1(21.336,54.991) N1.5@25.102,54.991 ; MUX1.1 46.101,60.281 46.101,61.722 53.841,61.722 54.93,60.633 56.969,60.633 60.071,57.531 60.071,31.242 60.452,30.861 82.169,30.861 83.439,29.591 83.439,27.686 ; I2.8 78.613,11.938 81.431,11.938 PWR.1 ; v1(85.852,24.13) 83.439,24.13 ; 86.995,13.462 89.916,13.462 I1.2 ; I1.1 88.646,15.137 85.979,12.47 ; I1.7 89.916,18.415 ; I1.6 91.186,18.796 90.805,18.415 89.916,18.415 ; v1(114.681,75.565) 114.681,93.98 MUX3.1@132.222,93.98 ; v1(129.032,24.13) 129.032,20.32 131.323,20.32 MUX4.1 ; v1(139.573,13.716) 141.112,12.177 N2.5 ; PWR.1 85.979,12.47 ; PWR.1 83.439,24.13 ; 83.439,24.13 83.439,27.686 ; 85.979,12.47 85.979,18.415 89.916,18.415
  Bottom Layer w0.254: v1(2.667,27.813) v1(2.667,62.357) 3.556,63.246 21.336,63.246 v1(21.336,54.991) ; v1(85.852,24.13) v1(129.032,24.13) ; v1(114.681,75.565) 129.032,75.565 v1(129.032,24.13) ; v1(139.573,13.716) 139.573,24.13 v1(129.032,24.13)
V-: I1.5 MUX1.28 | length 77.3
  Top Layer w0.254: MUX1.28 56.825,59.851 58.801,57.875 v1(58.801,36.83) ; I1.5 v1(92.456,34.671)
  Bottom Layer w0.254: v1(58.801,36.83) 90.805,36.83 90.805,34.671 v1(92.456,34.671)
VCC: C1.2 C4.1 I2.1 J1.2 J2.5 PIC.13 PIC.28 Q1.3 R3.2 | length 219.5
  Top Layer w0.254: v1(37.973,85.09) J2.5@37.973,95.988 ; R3.2 59.26,69.215 61.214,69.215 v1(62.103,68.326) ; v1(61.468,85.09) 61.468,90.17 69.469,98.171 104.14,98.171 104.14,90.424 100.1,90.424 J1.2 ; v1(66.04,68.326) 79.248,68.326 79.629,67.945 79.629,64.516 ; C4.1 70.104,43.815 70.104,49.276 PIC.13 66.548,49.276 66.548,41.91 v1(71.755,41.91) 95.25,41.91 Q1.3@95.25,39.313 ; v1(71.755,34.417) v1(71.755,38.862) ; I2.1 v1(73.914,25.527) ; PIC.28@77.345,64.516 PIC.28 79.629,64.516 ; C1.2@81.358,64.516 79.629,64.516
  Bottom Layer w0.254: v1(37.973,85.09) 63.373,85.09 63.373,68.326 ; v1(62.103,68.326) 63.373,68.326 ; v1(66.04,68.326) 63.373,68.326 ; v1(71.755,34.417) 73.914,34.417 v1(73.914,25.527) ; v1(71.755,38.862) v1(71.755,41.91)
"VCC OU V+": 
pads on no net: I1.8 I2.2 I2.3 I2.4 I2.5 I2.6 J1.6 J2.3 J2.8 MUX1.13 MUX1.20 MUX1.21 MUX1.22 MUX1.23 MUX1.24 MUX1.25 MUX1.26 MUX2.2 MUX2.3 MUX2.4 MUX2.5 MUX2.6 MUX2.7 MUX2.13 MUX2.19 MUX3.2 MUX3.3 MUX3.13 MUX4.2 MUX4.3 MUX4.13 MUX4.19 MUX4.20 MUX4.21 MUX4.22 N1.1 N2.1 X1.1 X1.2 X2.1 X2.2 X2.11 X2.12 X2.13 X2.14 X2.15 X2.16 Y1.1 Y1.9 Y1.17 Y1.25 Y1.33 Y1.34

## Polygon pours and split planes (outlines as drawn)
GND on Bottom Layer "GND Bottom" (solid, shelved, pour order 3): 0,0 152.4,0 152.4,101.6 0,101.6
GND on Bottom Layer "GND" (solid, remove dead copper, pour order 11): 1.778,100.33 1.778,1.397 1.651,1.27 1.778,1.397 150.495,1.397 150.495,100.076 150.368,100.203

## Other copper
Top Layer:
  text "Jgalvani industrie" at 114.046,2.286 h1.52

## Silkscreen, mask and mechanical layers (free items; w line width, h text height)
Drill Drawing:
  lines w0.025: 166.957,8.064 167.275,8.064 167.592,7.747 167.91,8.064 168.227,8.064 167.91,8.382 168.227,8.7 167.91,8.7 167.592,9.017 167.275,8.7 166.957,8.7 167.275,8.382 166.957,8.064 ; 166.957,11.557 167.592,11.874 168.227,11.557 167.91,12.192 168.227,12.827 167.592,12.509 166.957,12.827 167.275,12.192 166.957,11.557 ; 166.957,15.684 167.275,15.684 167.275,15.367 167.91,15.367 167.91,15.684 168.227,15.684 168.227,16.319 167.91,16.319 167.91,16.637 167.275,16.637 167.275,16.319 166.957,16.319 166.957,15.684 ; 166.957,19.177 168.227,19.177 168.227,20.447 166.957,20.447 166.957,19.177 ; 166.957,23.622 167.592,22.987 168.227,23.622 167.592,24.257 166.957,23.622 ; 166.957,26.797 166.957,27.114 167.275,27.432 166.957,27.749 166.957,28.067 167.275,28.067 167.592,27.749 167.91,28.067 168.227,28.067 168.227,27.749 167.91,27.432 168.227,27.114 168.227,26.797 167.91,26.797 167.592,27.114 167.275,26.797 166.957,26.797 ; 167.211,19.431 167.973,19.431 167.973,20.193 167.211,20.193 167.211,19.431
  lines w0.381: 165.227,6.604 263.753,6.604 ; 165.227,29.464 263.753,29.464 ; 179.219,2.794 179.219,33.274 ; 196.944,2.794 196.944,33.274 ; 231.122,2.794 231.122,33.274 ; 243.971,2.794 243.971,33.274 ; 165.227,2.794 263.753,2.794 263.753,33.274 165.227,33.274 165.227,2.794
  text "Symbol" at 167.513,30.607 h1.83
  text "Hit Count" at 180.362,30.607 h1.83
  text "Finished Hole Size" at 198.087,30.607 h1.83
  text "Plated" at 232.265,30.607 h1.83
  text "Hole Type" at 245.114,30.607 h1.83
  text "1" at 180.362,26.797 h1.52
  text "3.048mm (120.00mil)" at 198.087,26.797 h1.52
  text "PTH" at 232.265,26.797 h1.52
  text "Round" at 245.114,26.797 h1.52
  text "1" at 180.362,22.987 h1.52
  text "3.050mm (120.08mil)" at 198.087,22.987 h1.52
  text "PTH" at 232.265,22.987 h1.52
  text "Round" at 245.114,22.987 h1.52
  text "1" at 180.362,19.177 h1.52
  text "3.560mm (140.16mil)" at 198.087,19.177 h1.52
  text "PTH" at 232.265,19.177 h1.52
  text "Round" at 245.114,19.177 h1.52
  text "14" at 180.362,15.367 h1.52
  text "1.100mm (43.31mil)" at 198.087,15.367 h1.52
  text "PTH" at 232.265,15.367 h1.52
  text "Round" at 245.114,15.367 h1.52
  text "68" at 180.362,11.557 h1.52
  text "0.800mm (31.50mil)" at 198.087,11.557 h1.52
  text "PTH" at 232.265,11.557 h1.52
  text "Round" at 245.114,11.557 h1.52
  text "70" at 180.362,7.747 h1.52
  text "0.711mm (28.00mil)" at 198.087,7.747 h1.52
  text "PTH" at 232.265,7.747 h1.52
  text "Round" at 245.114,7.747 h1.52
  text "155 Total" at 180.362,3.937 h1.52

## Text inside footprints (layer, text, board x,y; h text height)
LS1: Top Overlay "+" at 104.902,48.514 h1.52
PWR: Top Overlay "exterieur" at 78.486,-5.969 h1.52